# Altium PCB Control.PcbDoc
Units mm, origin at the board's own origin, x right, y up, seen from the top; angles counter-clockwise.
Board outline 70 x 50.04 mm, 2 copper layers (Top Layer, Bottom Layer); 24 components, 42 nets, 138 pads, 30 vias.
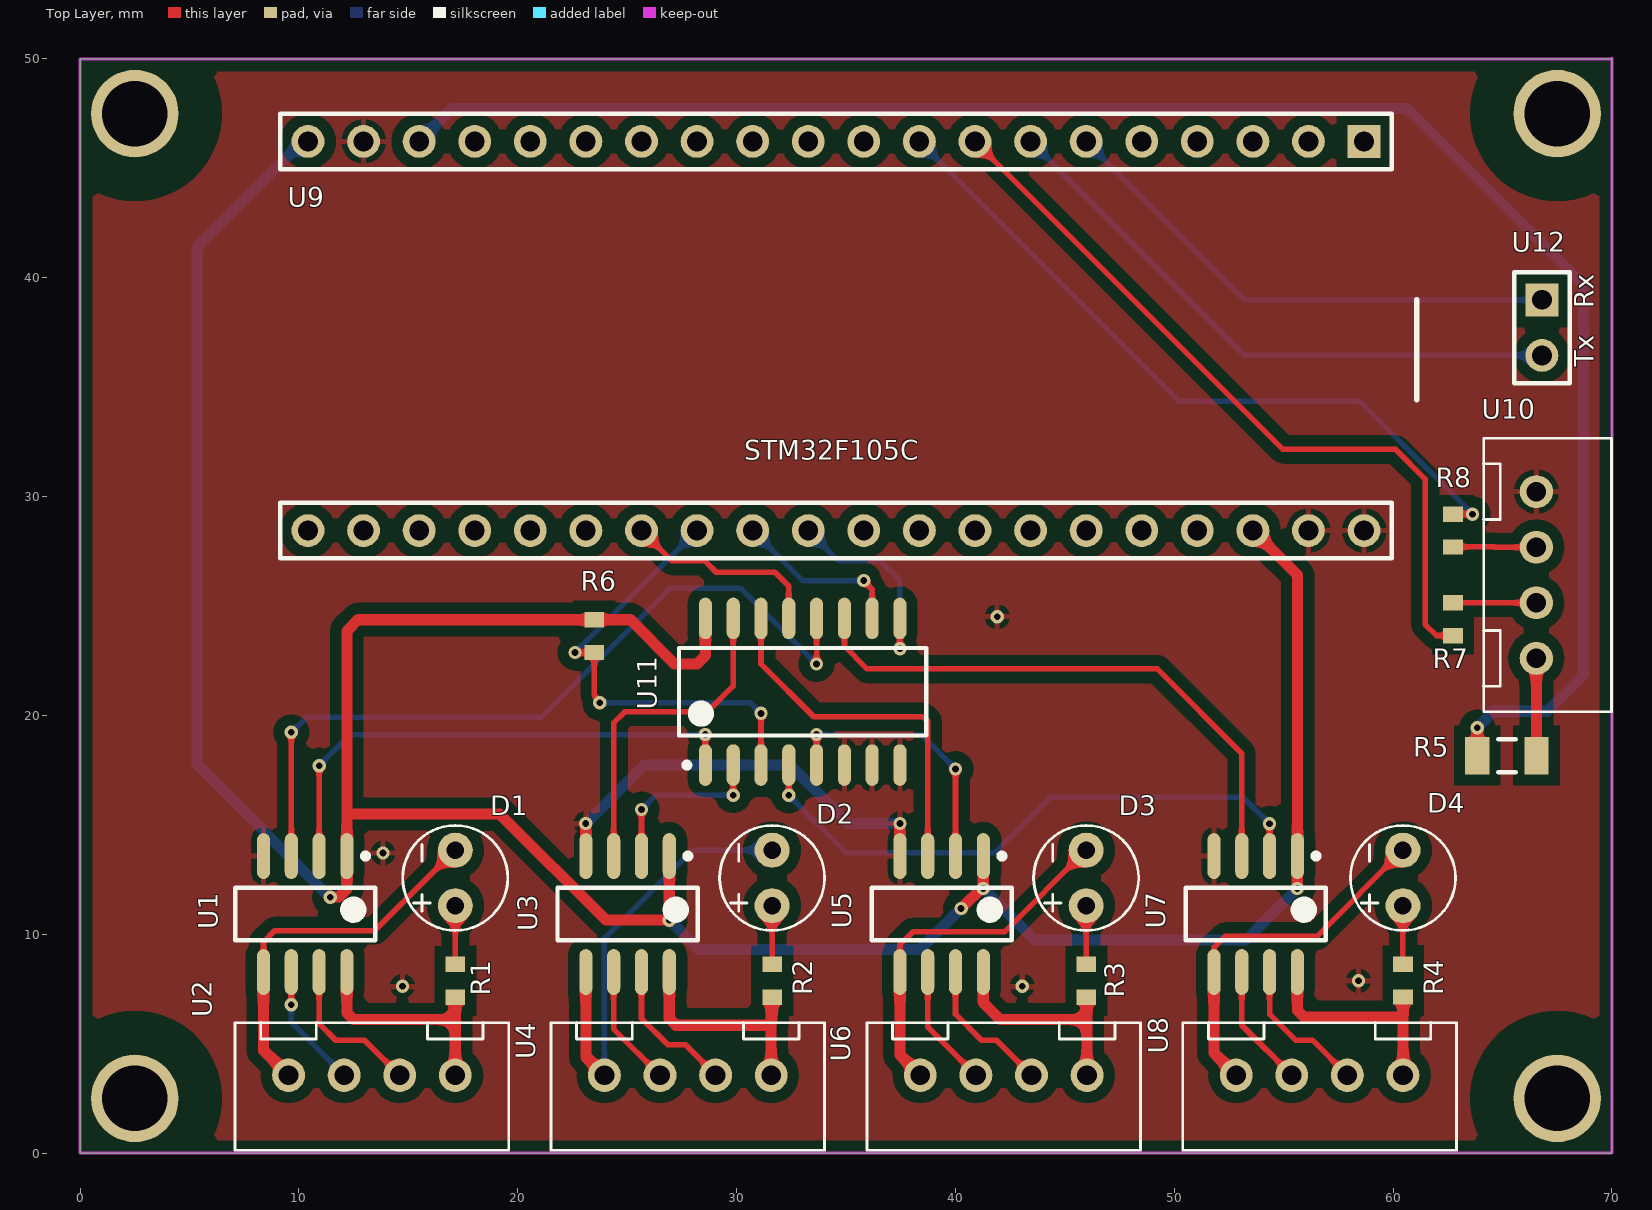
[diagram p0: Top Layer view]
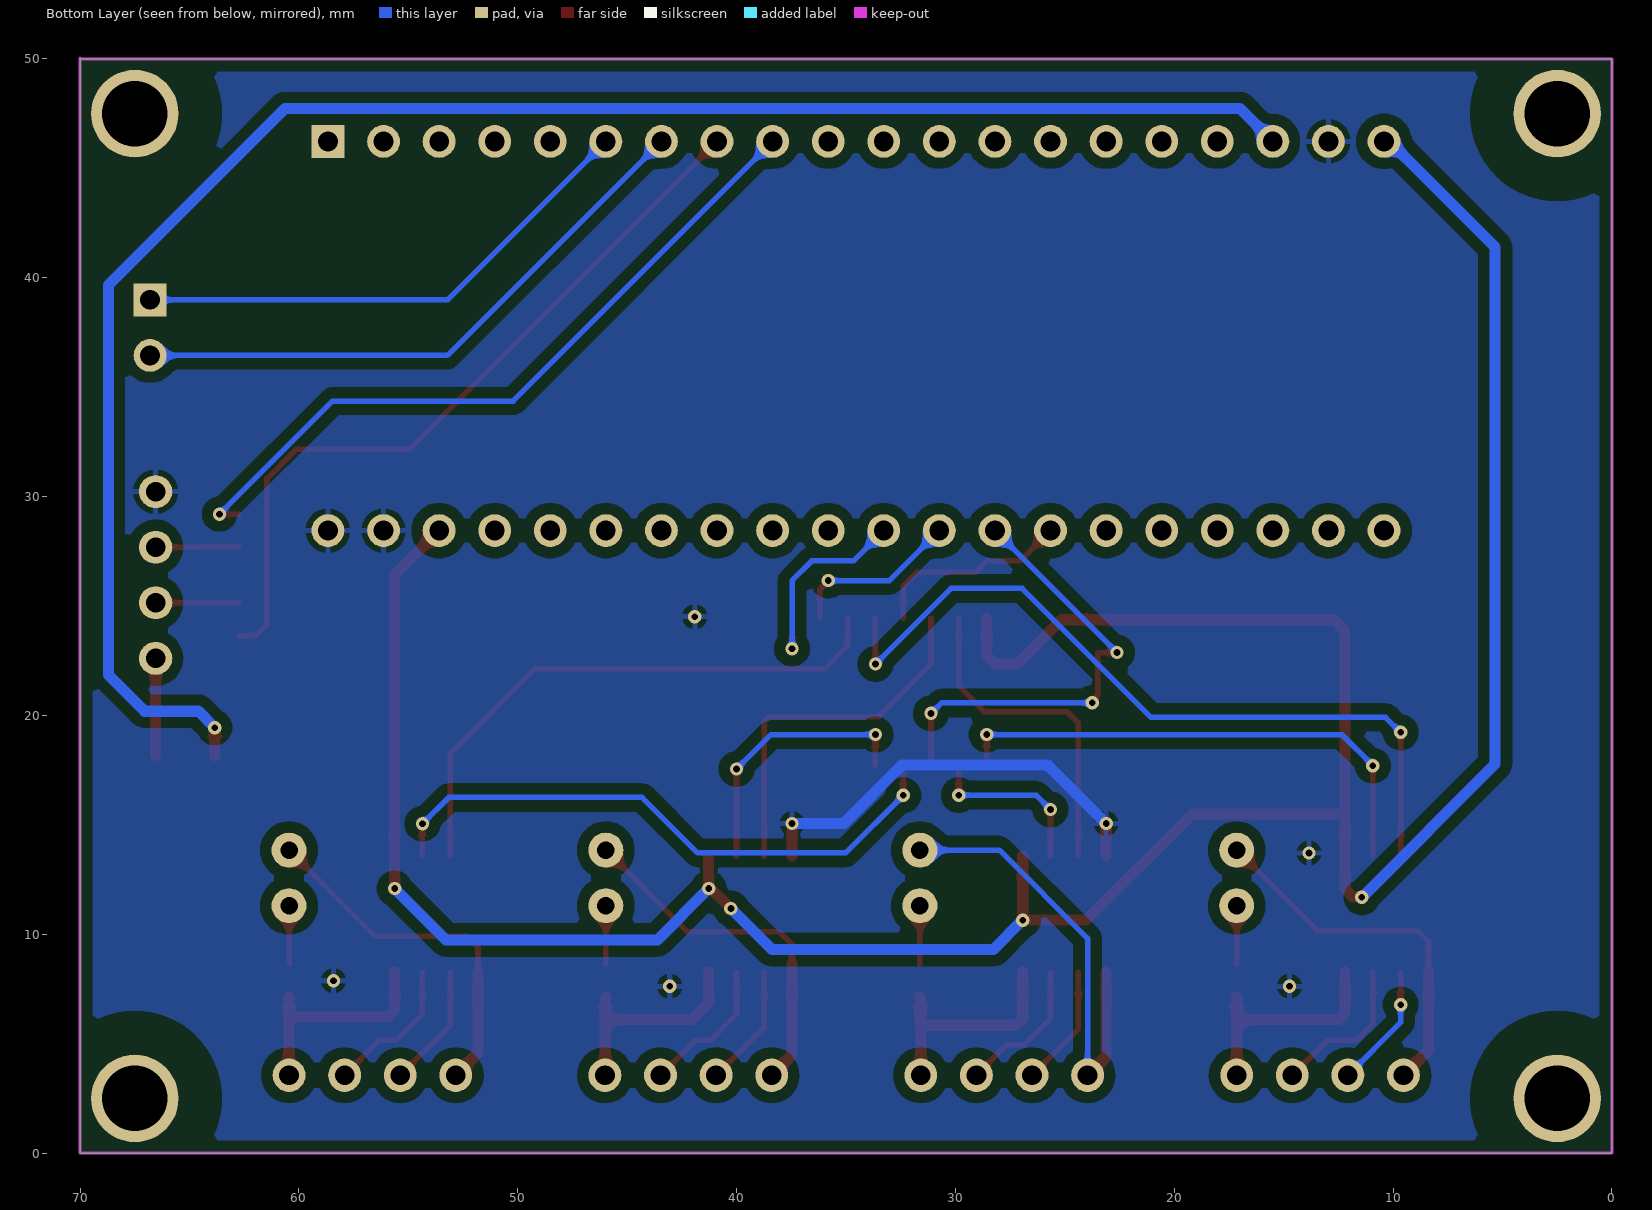
[diagram p1: Bottom Layer view, seen from below]

## Layer stack, top to bottom
Top Solder: solder mask 0.0102, Solder Resist, Dk 3.5
Top Layer: signal copper 0.0356
Dielectric 1: dielectric 0.32, FR-4, Dk 4.8
Bottom Layer: signal copper 0.0356
Bottom Solder: solder mask 0.0102, Solder Resist, Dk 3.5

## Board outline
0,0 0,50 70,50 70,50.038 70,0

## Design rules (kind name [scope] priority, off if disabled: settings)
Clearance Clearance_1 [not ( WithinRoom('RoomDefinition1') or WithinRoom('RoomDefinition2') or WithinRoom('RoomDefinition3') or WithinRoom('RoomDefinition4')   ) vs not ( WithinRoom('RoomDefinition1') or WithinRoom('RoomDefinition2') or WithinRoom('RoomDefinition3') or WithinRoom('RoomDefinition4')   )] p1: gap=0.254 ignorepadtopadclearanceinfootprint=FALSE except(0.508: Arc-Poly Track-Track Track-THPad Track-Poly SMDPad-Poly THPad-Poly Via-Poly Fill-Poly Poly-Poly Poly-Region Poly-Text Poly-Hole)
Clearance [WithinRoom('RoomDefinition1') or WithinRoom('RoomDefinition2') or WithinRoom('RoomDefinition3') or WithinRoom('RoomDefinition4') vs WithinRoom('RoomDefinition1') or WithinRoom('RoomDefinition2') or WithinRoom('RoomDefinition3') or WithinRoom('RoomDefinition4')] p2: gap=0.254 ignorepadtopadclearanceinfootprint=FALSE
ComponentClearance [All] p1: gap=0.254 collisioncheckmode=3 verticalgap=0 showdistances=FALSE donotcheckwithout3dbody=TRUE
HoleSize [All] p1: absolutevalues=TRUE maxlimit=3 minlimit=0.025 maxpercent=80.000 minpercent=20.000
PolygonConnect [All] p1: connectstyle=Relief reliefconductorwidth=0.254 reliefentries=4 polygonreliefangle="90 Angle" airgapwidth=0.254
RoomDefinition RoomDefinition4 [False] p1: confinementstyle=ConfineIn formatcopy=TRUE lockcomponents=FALSE outline 63.5,47.5 ccw(c67.5,47.5) 67.5,43.5 ccw(c67.5,47.5) 71.5,47.5 ccw(c67.5,47.5) 67.5,51.5 ccw(c67.5,47.5)
RoomDefinition RoomDefinition3 [False] p2: confinementstyle=ConfineIn formatcopy=TRUE lockcomponents=FALSE outline 63.5,2.5 ccw(c67.5,2.5) 67.5,-1.5 ccw(c67.5,2.5) 71.5,2.5 ccw(c67.5,2.5) 67.5,6.5 ccw(c67.5,2.5)
RoomDefinition RoomDefinition2 [False] p3: confinementstyle=ConfineIn formatcopy=TRUE lockcomponents=FALSE outline 2.5,-1.5 cw(c2.5,2.5) -1.5,2.5 cw(c2.5,2.5) 2.5,6.5 cw(c2.5,2.5) 6.5,2.5 cw(c2.5,2.5)
RoomDefinition RoomDefinition1 [False] p4: confinementstyle=ConfineIn formatcopy=TRUE lockcomponents=FALSE outline 2.5,43.5 cw(c2.5,47.5) -1.5,47.5 cw(c2.5,47.5) 2.5,51.5 cw(c2.5,47.5) 6.5,47.5 cw(c2.5,47.5)
RoutingCorners USB1 [InNetClass('USB')] p1: cornerstyle=45-Degree minsetback=2.54 maxsetback=2.54
RoutingCorners DebugSerial1 [InNetClass('DebugSerial')] p2: cornerstyle=45-Degree minsetback=2.54 maxsetback=2.54
RoutingCorners Power1 [InNetClass('Power')] p3: cornerstyle=45-Degree minsetback=2.54 maxsetback=2.54
RoutingPriority DebugSerial [InNetClass('DebugSerial')] p1: routingpriority=2
RoutingPriority USB [InNetClass('USB')] p2: routingpriority=3
RoutingPriority [InNetClass('Power')] p3: routingpriority=1
RoutingVias [All] p1: holewidth=0.305 width=0.61 viastyle="Through Hole" minholewidth=0.305 minwidth=0.61 maxholewidth=0.305 maxwidth=0.61
SMDEntry SMDEntry_1 [HasFootprint('SOP127P762-16L')] p1: side=FALSE corner=FALSE anyangle=FALSE
SMDEntry [HasFootprint('SOP127P636-8L')] p2: side=FALSE corner=FALSE anyangle=FALSE
SolderMaskExpansion [All] p1: expansion=0.102 istentingtop=FALSE
SupplyNets "Schematic Supply Nets_1" [InNet('+5')] p1: voltage=0.000
SupplyNets "Schematic Supply Nets" [InNet('GND')] p2: voltage=0.000
Width Power [InNetClass('Power')] p1: maxlimit=0.508 minlimit=0.254 preferedwidth=0.508
Width [All] p2: maxlimit=0.508 minlimit=0.254 preferedwidth=0.254
26 further rules are at their usual default settings.

## Classes and differential pairs
net class Power: 3.3V +5 GND NetD1_2 NetD2_2 NetD3_2 NetD4_2 NetR1_2 NetR2_2 NetR3_2 NetR4_2 NetR5_1
net class USB: NetR7_2 NetR8_2 PA11 PA12
net class DebugSerial: DRX DTX

## Components (designator, comment, footprint, x,y, rotation, side; value= is the part's Value field where it differs from the comment)
D1 "CN0" LED 17.145,12.573 r180 top
D2 "CN2" LED 31.623,12.573 r180 top
D3 "CN1" LED 45.974,12.573 r180 top
D4 "CN3" LED 60.452,12.573 r180 top
R1 "" RESC1608L 17.145,7.874 r270 top value=1K
R2 "" RESC1608L 31.623,7.874 r270 top value=1K
R3 "" RESC1608L 45.974,7.874 r270 top value=1K
R4 "" RESC1608L 60.452,7.886 r270 top value=1K
R5 "500mA Fuse" RESC3216L 65.198,18.161 r180 top value=0R
R6 "" RESC1608L 23.495,23.622 r90 top value=10K
R7 "" RESC1608L 62.738,24.396 r90 top value=20R
R8 "" RESC1608L 62.738,28.448 r270 top value=20R
U1 "ISO6721B" SOP127P636-8L 10.287,10.922 r270 top
U2 "SERIAL4P" X254-4P 13.335,3.556 r0 top
U3 "ISO6721B" SOP127P636-8L 25.019,10.922 r270 top
U4 "SERIAL4P" X254-4P 27.771,3.556 r0 top
U5 "ISO6721B" SOP127P636-8L 39.37,10.922 r270 top
U6 "SERIAL4P" X254-4P 42.206,3.556 r0 top
U7 "ISO6721B" SOP127P636-8L 53.721,10.922 r270 top
U8 "SERIAL4P" X254-4P 56.642,3.556 r0 top
U9 "STM32F103CCORE" STM32F103C 58.674,46.228 r180 top
U10 "USB-X254" X254-4P 66.548,26.416 r90 top
U11 "74HC4052" SOP127P762-16L 33.02,21.082 r90 top
U12 "CTLDBG" CTLDBG 66.802,38.989 r270 top

## Footprints (in the part's own frame and the unit in brackets; to place one, negate y for a bottom-side part, rotate by r counter-clockwise, add the part's x,y. Pads: shape width x height; smd on the part's side, far side on the other; paste and mask are expansions set on the pad)
CTLDBG [mm]
  rect 1.5x1.5 hole 0.9: 1(0,0)
  round 1.5 hole 0.9: 2(2.54,0)
  silkscreen extent -1.27,-1.27 3.81,1.27
LED [mm] "LED; 2 Leads"
  round 1.6 hole 0.8: 1(0,1.27) 2(0,-1.27)
  silkscreen extent -2.4,-2.4 2.4,2.4
RESC1608L [mm] "Chip Resistor, Body 1.6x0.8mm, IPC High Density"
  rect 0.7x0.9 smd: 1(-0.75,0) 2(0.75,0)
  body extent -0.85,-0.48 0.85,0.48, height 0.6
RESC3216L [mm] "Chip Resistor, Body 3.2x1.6mm, IPC High Density"
  rect 1.1x1.7 smd: 1(-1.35,0) 2(1.35,0)
  silkscreen extent -0.4,-0.75 0.4,0.75, body extent -1.68,-0.87 1.68,0.87, height 0.71
SOP127P636-8L [mm] "SOP, 8-Leads, Body 6x4.7mm, Pitch 1.27mm, IPC High Density"
  oval 2.1x0.6 smd: 1(-2.65,1.905) 2(-2.65,0.635) 3(-2.65,-0.635) 4(-2.65,-1.905) 5(2.65,-1.905) 6(2.65,-0.635) 7(2.65,0.635) 8(2.65,1.905)
  silkscreen extent -2.77,-3.2 1.2,3.2, body extent -2.36,-3.18 2.36,3.18, height 1.5
SOP127P762-16L [mm] "16-Pin Small Outline Package 1.27 mm Pitch"
  oval 1.9x0.6 smd: 1(-3.35,4.445) 2(-3.35,3.175) 3(-3.35,1.905) 4(-3.35,0.635) 5(-3.35,-0.635) 6(-3.35,-1.905) 7(-3.35,-3.175) 8(-3.35,-4.445) 9(3.35,-4.445) 10(3.35,-3.175) 11(3.35,-1.905) 12(3.35,-0.635) 13(3.35,0.635) 14(3.35,1.905) 15(3.35,3.175) 16(3.35,4.445)
  silkscreen extent -3.47,-5.65 2,5.65, body extent -2.85,-5.65 2.85,5.65, height 2.2
STM32F103C [mm] "STM32F103C Core"
  rect 1.5x1.5 hole 0.9: 1(0,0)
  round 1.5 hole 0.9: 2(2.54,0) 3(5.08,0) 4(7.62,0) 5(10.16,0) 6(12.7,0) 7(15.24,0) 8(17.78,0) 9(20.32,0) 10(22.86,0) 11(25.4,0) 12(27.94,0) 13(30.48,0) 14(33.02,0) 15(35.56,0) 16(38.1,0) 17(40.64,0) 18(43.18,0) 19(45.72,0) 20(48.26,0) 21(48.26,17.78) 22(45.72,17.78) 23(43.18,17.78) 24(40.64,17.78) 25(38.1,17.78) 26(35.56,17.78) 27(33.02,17.78) 28(30.48,17.78) 29(27.94,17.78) 30(25.4,17.78) 31(22.86,17.78) 32(20.32,17.78) 33(17.78,17.78) 34(15.24,17.78) 35(12.7,17.78) 36(10.16,17.78) 37(7.62,17.78) 38(5.08,17.78) 39(2.54,17.78) 40(0,17.78)
  silkscreen extent -2.41,-1.27 49.53,19.05
X254-4P [mm] "X254-4P"
  oval 1.5x1.524 hole 0.9: 1(-3.81,0) 2(-1.27,0) 3(1.27,0) 4(3.81,0)
  silkscreen extent -6.25,-3.43 6.25,2.41, body extent -6.22,-3.43 6.22,2.41, height 7

## Part data
D1 D2 D3 D4: library part LED1, "Typical RED GaAs LED", LatestRevisionDate=08-Jul-2005, LatestRevisionNote="Mech Layer 1 removed.", PackageDescription="LED; 2 Leads", PackageReference=LED-1, Published=8-Jun-2000, Publisher="Altium Limited"
R1 R2 R3 R4 R5 R6 R7 R8: library part Res1, "Resistor", LatestRevisionDate=17-Jul-2002, LatestRevisionNote="Re-released for DXP Platform.", PackageDescription="Axial Device, Thru-Hole; 2 Leads; 0.3 in Pin Spacing", PackageReference=AXIAL-0.3, Published=8-Jun-2000, Publisher="Altium Limited"

## Free pads (board coordinates)
  round 4 hole 3 mask+0.102: 0(2.5,2.5) 0(2.5,47.5) 0(67.5,2.5) 0(67.5,47.5)

## Via types
v1: diameter 0.61, hole 0.305, Top Layer to Bottom Layer, 30 vias

## Nets (pads, with @x,y where several pads share a name; then routed paths per layer and width w, separated by ;. In a path a pad name is that pad's centre, name@x,y a point inside that pad or via, vN(x,y) a via of type N, cw(c..) or ccw(c..) an arc to the next point about the centre after c; other vN are vias at no path point)
3.3V: R6.2 U1.1 U3.1 U5.1 U7.1 U9.20 U9.38 U11.16 | length 142.1
  Top Layer w0.508: v1(11.43,11.684) 11.45,11.704 11.831,11.704 12.192,12.065 12.192,15.367 ; U3.1 v1(26.924,10.643) 24.028,10.643 19.177,15.494 12.319,15.494 12.192,15.367 ; U11.16 28.575,22.733 28.194,22.352 27.166,22.352 25.146,24.372 R6.2 12.7,24.372 12.192,23.864 12.192,15.367 ; v1(40.259,11.176) v1@41.275,12.192 ; v1(41.275,12.09) v1@41.275,12.192 ; U5.1 v1@41.275,12.192 ; U9.38 55.626,26.416 U7.1 v1(55.626,12.09)
  Bottom Layer w0.508: U9.20 10.16,46.228 5.334,41.402 5.334,17.78 v1(11.43,11.684) ; v1(26.924,10.643) 28.27,9.296 38.379,9.296 v1(40.259,11.176) ; v1(41.275,12.09) 43.624,9.741 53.277,9.741 v1(55.626,12.09)
+5: R5.2 U9.18 | length 82.1
  Top Layer w0.508: R5.2 v1(63.848,19.443)
  Bottom Layer w0.508: U9.18 17.006,47.74 60.629,47.74 68.707,39.662 68.707,21.844 67.056,20.193 64.598,20.193 v1(63.848,19.443)
DRX: U9.7 U12.2 | length 27.4
  Bottom Layer w0.254: U9.7 53.213,36.449 U12.2
DTX: U9.6 U12.1 | length 23.8
  Bottom Layer w0.254: U9.6 53.213,38.989 U12.1
GND: U1.4 U3.4 U5.4 U7.4 U9.19 U9.39 U9.40 U10.4 U11.6 U11.7 U11.8 | length 19.5
  Top Layer w0.508: U3.4 v1(23.114,15.062) ; U5.4 v1(37.465,15.062)
  Bottom Layer w0.508: v1(23.114,15.062) 25.781,17.729 32.436,17.729 35.103,15.062 v1(37.465,15.062)
  other v1: 14.732,7.62 43.053,7.62 58.42,7.874 13.843,13.716 41.91,24.511
NetD1_1: D1.1 R1.1 | length 2.7
  Top Layer w0.254: R1.1 D1.1
NetD1_2: D1.2 U1.5 U2.1 | length 17.1
  Top Layer w0.254: U1.5 8.382,9.652 8.89,10.16 13.462,10.16 D1.2
  Top Layer w0.508: U1.5 8.382,4.699 U2.1
NetD2_1: D2.1 R2.1 | length 2.7
  Top Layer w0.254: R2.1 D2.1
NetD2_2: D2.2 U3.5 U4.1 | length 20.7
  Top Layer w0.508: U3.5 23.114,4.403 U4.1
  Bottom Layer w0.254: U4.1 23.961,9.813 27.991,13.843 D2.2
NetD3_1: D3.1 R3.1 | length 2.7
  Top Layer w0.254: R3.1 D3.1
NetD3_2: D3.2 U5.5 U6.1 | length 16.7
  Top Layer w0.254: U5.5@37.465,8.636 37.465,9.525 38.049,10.109 42.24,10.109 D3.2
  Top Layer w0.508: U5.5@37.465,8.636 37.465,4.487 U6.1
NetD4_1: D4.1 R4.1 | length 2.7
  Top Layer w0.254: R4.1 D4.1
NetD4_2: D4.2 U7.5 U8.1 | length 16.7
  Top Layer w0.254: U7.5 51.816,9.398 52.324,9.906 56.515,9.906 D4.2
  Top Layer w0.508: U7.5 51.816,4.572 U8.1
NetR1_2: R1.2 U1.8 U2.4 | length 10.5
  Top Layer w0.508: U1.8 12.192,6.394 12.49,6.096 17.145,6.096 ; U2.4 17.145,6.096 ; R1.2 17.145,6.928 17.145,6.096
NetR2_2: R2.2 U3.8 U4.4 | length 11.8
  Top Layer w0.508: U3.8 26.924,6.14 27.222,5.842 31.496,5.842 31.623,5.969 R2.2 ; U4.4 31.581,5.842 31.581,7.028 R2.2@31.677,7.124
NetR3_2: R3.2 U5.8 U6.4 | length 10
  Top Layer w0.508: U5.8 41.275,6.858 42.037,6.096 46.006,6.096 ; R3.2 46.006,7.092 46.006,6.096 ; U6.4@46.006,3.566 46.006,6.096
NetR4_2: R4.2 U7.8 U8.4 | length 10.3
  Top Layer w0.508: U7.8 55.626,6.511 55.924,6.214 60.452,6.214 R4.2 ; U8.4@60.457,3.561 60.457,6.214
NetR5_1: R5.1 U10.1 | length 4.4
  Top Layer w0.508: R5.1 U10.1
NetR7_2: R7.2 U10.2 | length 3.8
  Top Layer w0.254: R7.2 U10.2
NetR8_2: R8.2 U10.3 | length 3.8
  Top Layer w0.254: R8.2 64.618,27.698 64.63,27.686 U10.3
NetU1_6: U1.6 U2.2 | length 5.7
  Top Layer w0.254: v1(9.652,6.782) U1.6
  Bottom Layer w0.254: v1(9.652,6.782) 9.652,5.969 U2.2
NetU1_7: U1.7 U2.3 | length 7
  Top Layer w0.254: U1.7 10.922,5.918 11.684,5.156 13.005,5.156 U2.3
NetU3_6: U3.6 U4.2 | length 5.6
  Top Layer w0.254: U3.6 24.384,5.673 U4.2
NetU3_7: U3.7 U4.3 | length 6.7
  Top Layer w0.254: U3.7 25.654,6.152 26.853,4.953 27.656,4.953 29.053,3.556 U4.3@29.125,3.556
NetU5_6: U5.6 U6.2 | length 5.6
  Top Layer w0.254: U5.6 38.735,5.757 U6.2
NetU5_7: U5.7 U6.3 | length 6.6
  Top Layer w0.254: U5.7 40.005,6.35 41.199,5.156 41.876,5.156 U6.3
NetU7_6: U7.6 U8.2 | length 5.7
  Top Layer w0.254: U7.6 53.086,5.842 U8.2
NetU7_7: U7.7 U8.3 | length 6.6
  Top Layer w0.254: U7.7 54.356,6.35 55.547,5.159 56.309,5.159 U8.3
PA11: R7.1 U9.8 | length 35.1
  Top Layer w0.254: U9.8 54.966,32.156 60.122,32.156 61.468,30.81 61.468,24.154 61.976,23.646 R7.1
PA12: R8.1 U9.9 | length 33.2
  Top Layer w0.254: R8.1 v1(63.627,29.198)
  Bottom Layer w0.254: U9.9 50.216,34.366 58.459,34.366 v1(63.627,29.198)
R0: U1.2 U11.1 | length 23.8
  Top Layer w0.254: U1.2 v1(10.922,17.704) ; U11.1 v1(28.575,19.126)
  Bottom Layer w0.254: v1(10.922,17.704) 12.344,19.126 v1(28.575,19.126)
R1: U5.2 U11.5 | length 12.4
  Top Layer w0.254: U11.5 v1(33.655,19.126) ; U5.2 v1(40.005,17.551)
  Bottom Layer w0.254: v1(33.655,19.126) 38.43,19.126 v1(40.005,17.551)
R2: U3.2 U11.2 | length 8
  Top Layer w0.254: U3.2 v1(25.654,15.697) ; v1(29.845,16.358) U11.2
  Bottom Layer w0.254: v1(25.654,15.697) 26.314,16.358 v1(29.845,16.358)
R3: U7.2 U11.4 | length 27.5
  Top Layer w0.254: v1(32.385,16.35) U11.4 ; U7.2 v1(54.356,15.054)
  Bottom Layer w0.254: v1(32.385,16.35) 35.019,13.716 41.783,13.716 44.323,16.256 53.154,16.256 v1(54.356,15.054)
RX: R6.1 U9.28 U11.3 | length 21.1
  Top Layer w0.254: v1(22.618,22.872) R6.1 23.495,20.924 23.749,20.67 v1(23.749,20.574) ; U11.3 v1(31.115,20.091)
  Bottom Layer w0.254: v1(22.618,22.872) U9.28 ; v1(23.749,20.574) 30.627,20.574 31.11,20.091 v1(31.115,20.091)
S0: U9.29 U11.10 | length 7.9
  Top Layer w0.254: v1(35.814,26.162) 35.814,26.144 36.195,25.763 U11.10
  Bottom Layer w0.254: U9.29 33.02,26.162 v1(35.814,26.162)
S1: U9.30 U11.9 | length 9.6
  Top Layer w0.254: v1(37.465,23.05) U11.9
  Bottom Layer w0.254: U9.30 34.659,27.063 36.564,27.063 37.465,26.162 v1(37.465,23.05)
T0: U1.3 U11.12 | length 35.9
  Top Layer w0.254: U1.3 v1(9.652,19.228) ; v1(33.655,22.352) U11.12
  Bottom Layer w0.254: v1(9.652,19.228) 10.338,19.914 21.057,19.914 26.949,25.806 30.201,25.806 v1(33.655,22.352)
T1: U5.3 U11.14 | length 16.9
  Top Layer w0.254: U11.14 31.115,22.352 33.528,19.939 38.532,19.939 38.735,19.736 U5.3
T2: U3.3 U11.15 | length 15.3
  Top Layer w0.254: U3.3 24.384,19.66 24.892,20.168 28.677,20.168 29.845,21.336 U11.15
T3: U7.3 U11.11 | length 26.1
  Top Layer w0.254: U11.11 34.925,23.165 35.966,22.123 49.225,22.123 53.086,18.263 U7.3
TX: U9.27 U11.13 | length 9.3
  Top Layer w0.254: U9.27 27.039,27.063 28.55,27.063 29.07,26.543 31.75,26.543 32.385,25.908 U11.13
pads on no net: U9.1 U9.2 U9.3 U9.4 U9.5 U9.10 U9.11 U9.12 U9.13 U9.14 U9.15 U9.16 U9.17 U9.21 U9.22 U9.23 U9.24 U9.25 U9.26 U9.31 U9.32 U9.33 U9.34 U9.35 U9.36 U9.37

## Polygon pours and split planes (outlines as drawn)
GND on Top Layer "GND_L01_P001" (solid, remove dead copper, pour order 1): 0,0 0,50 70,50 70,50.038 70,0
GND on Bottom Layer "GND_L02_P000" (solid, remove dead copper, pour order 0): 0,0 0,50 70,50 70,50.038 70,0

## Keep-outs
Keep-Out Layer:
  lines w0.127: 70,50 0,50 0,0 70,0 70,50.038

## Other copper
Multi-Layer:
  pour cut-out: 63.5,2.5 ccw(c67.5,2.5) 67.5,-1.5 ccw(c67.5,2.5) 71.5,2.5 ccw(c67.5,2.5) 67.5,6.5 ccw(c67.5,2.5)
  pour cut-out: 63.5,47.5 ccw(c67.5,47.5) 67.5,43.5 ccw(c67.5,47.5) 71.5,47.5 ccw(c67.5,47.5) 67.5,51.5 ccw(c67.5,47.5)
  pour cut-out: 2.5,43.5 cw(c2.5,47.5) -1.5,47.5 cw(c2.5,47.5) 2.5,51.5 cw(c2.5,47.5) 6.5,47.5 cw(c2.5,47.5)
  pour cut-out: 2.5,-1.5 cw(c2.5,2.5) -1.5,2.5 cw(c2.5,2.5) 2.5,6.5 cw(c2.5,2.5) 6.5,2.5 cw(c2.5,2.5)

## Silkscreen, mask and mechanical layers (free items; w line width, h text height)
Top Solder:
  text "Control V1.3 sTeeLM" at 4.429,22.352 h1.52 r90

## Text inside footprints (layer, text, board x,y; h text height)
U9: Top Overlay "STM32F105C" at 30.353,31.385 h1.52
U12: Top Overlay "Rx" at 69.469,38.608 h1.52 r90; Top Overlay "Tx" at 69.469,35.941 h1.52 r90